# Altium PCB PCB1.PcbDoc
Units mil, origin at the board's own origin, x right, y up, seen from the top; angles counter-clockwise.
Board outline 3445 x 3905 mil, 4 copper layers (Top Layer, GND, VCC, Bottom Layer), stack 30.634 mil thick; 58 components, 59 nets, 334 pads, 77 vias.
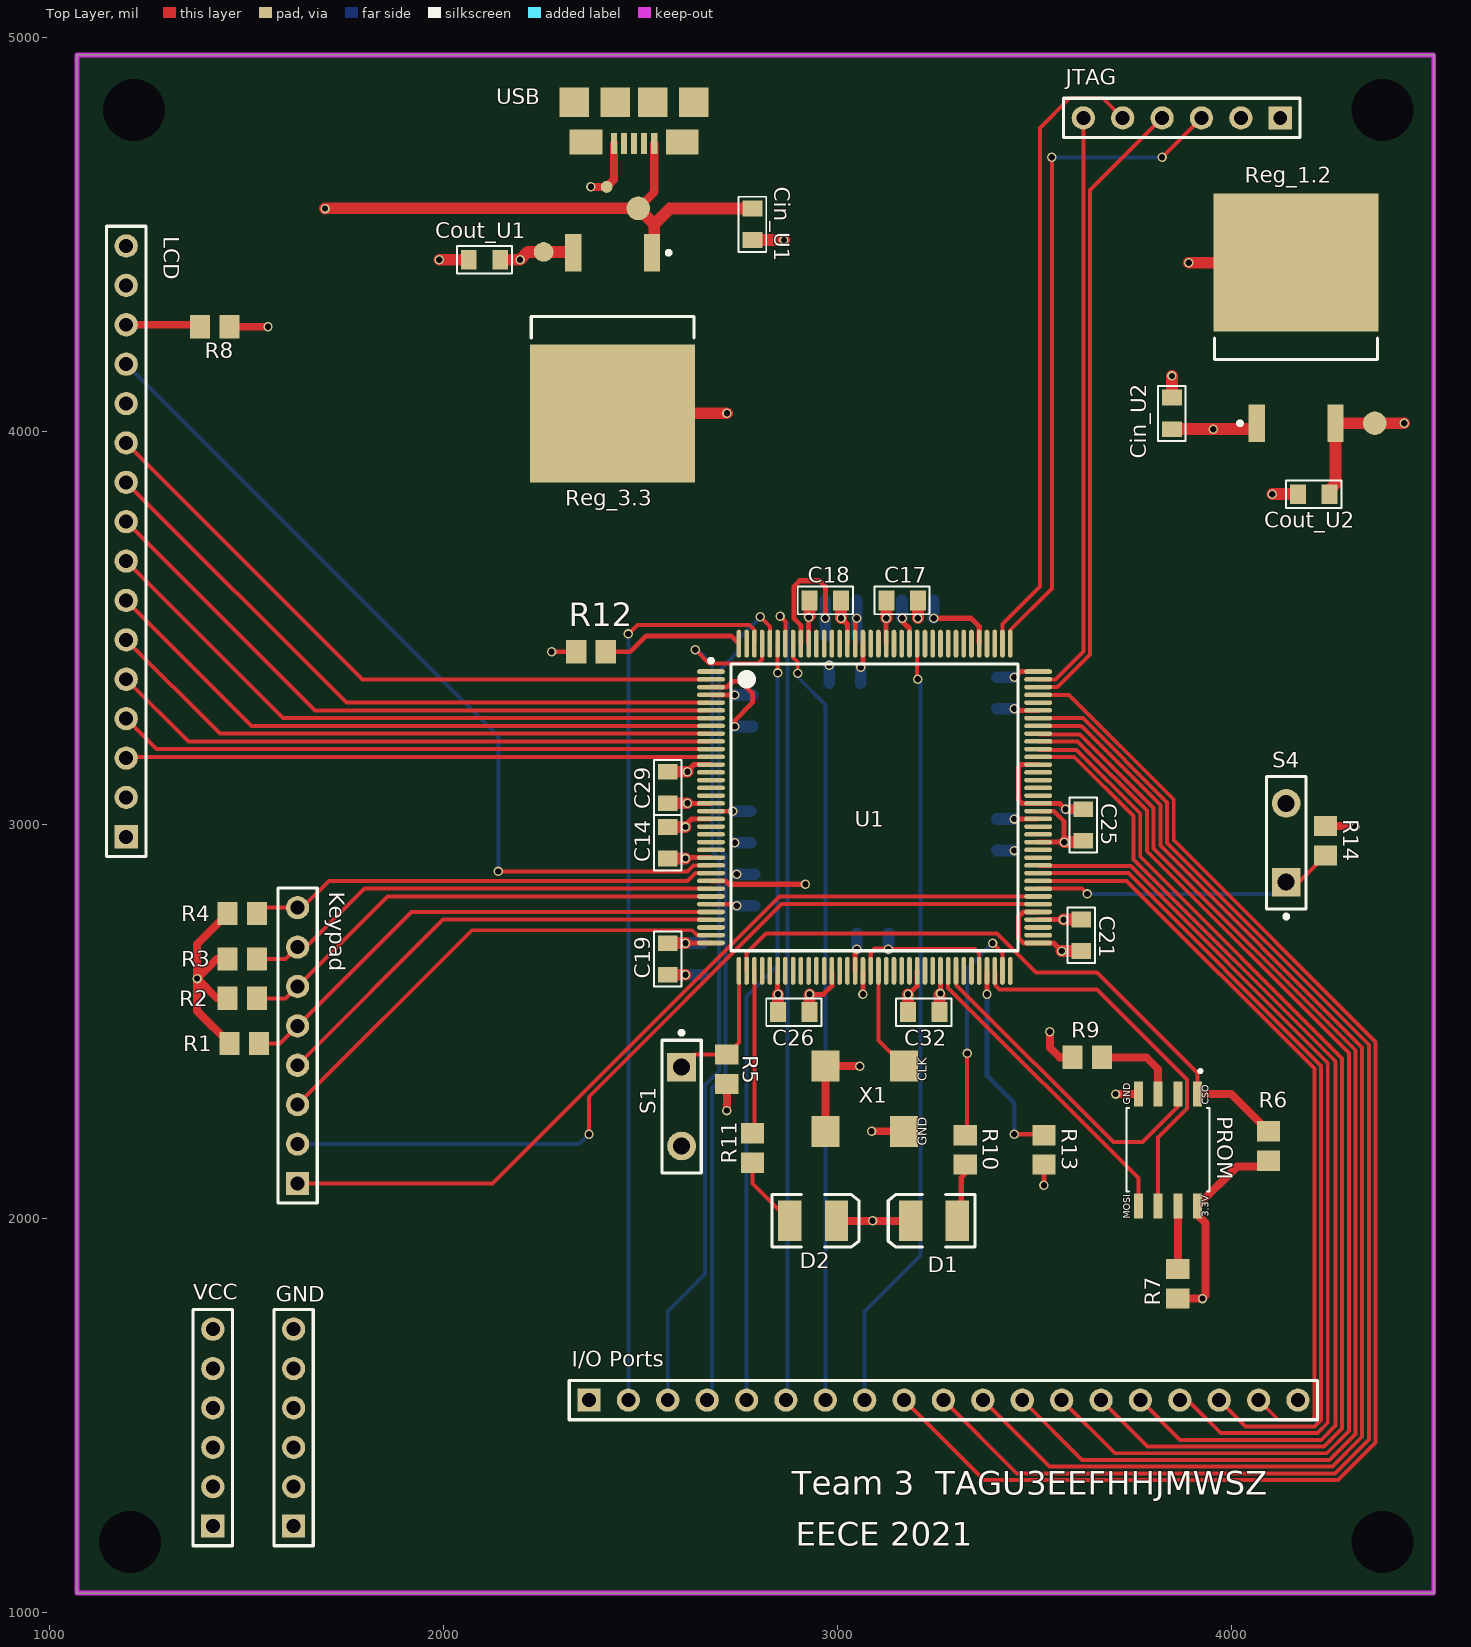
[diagram p0: Top Layer view]
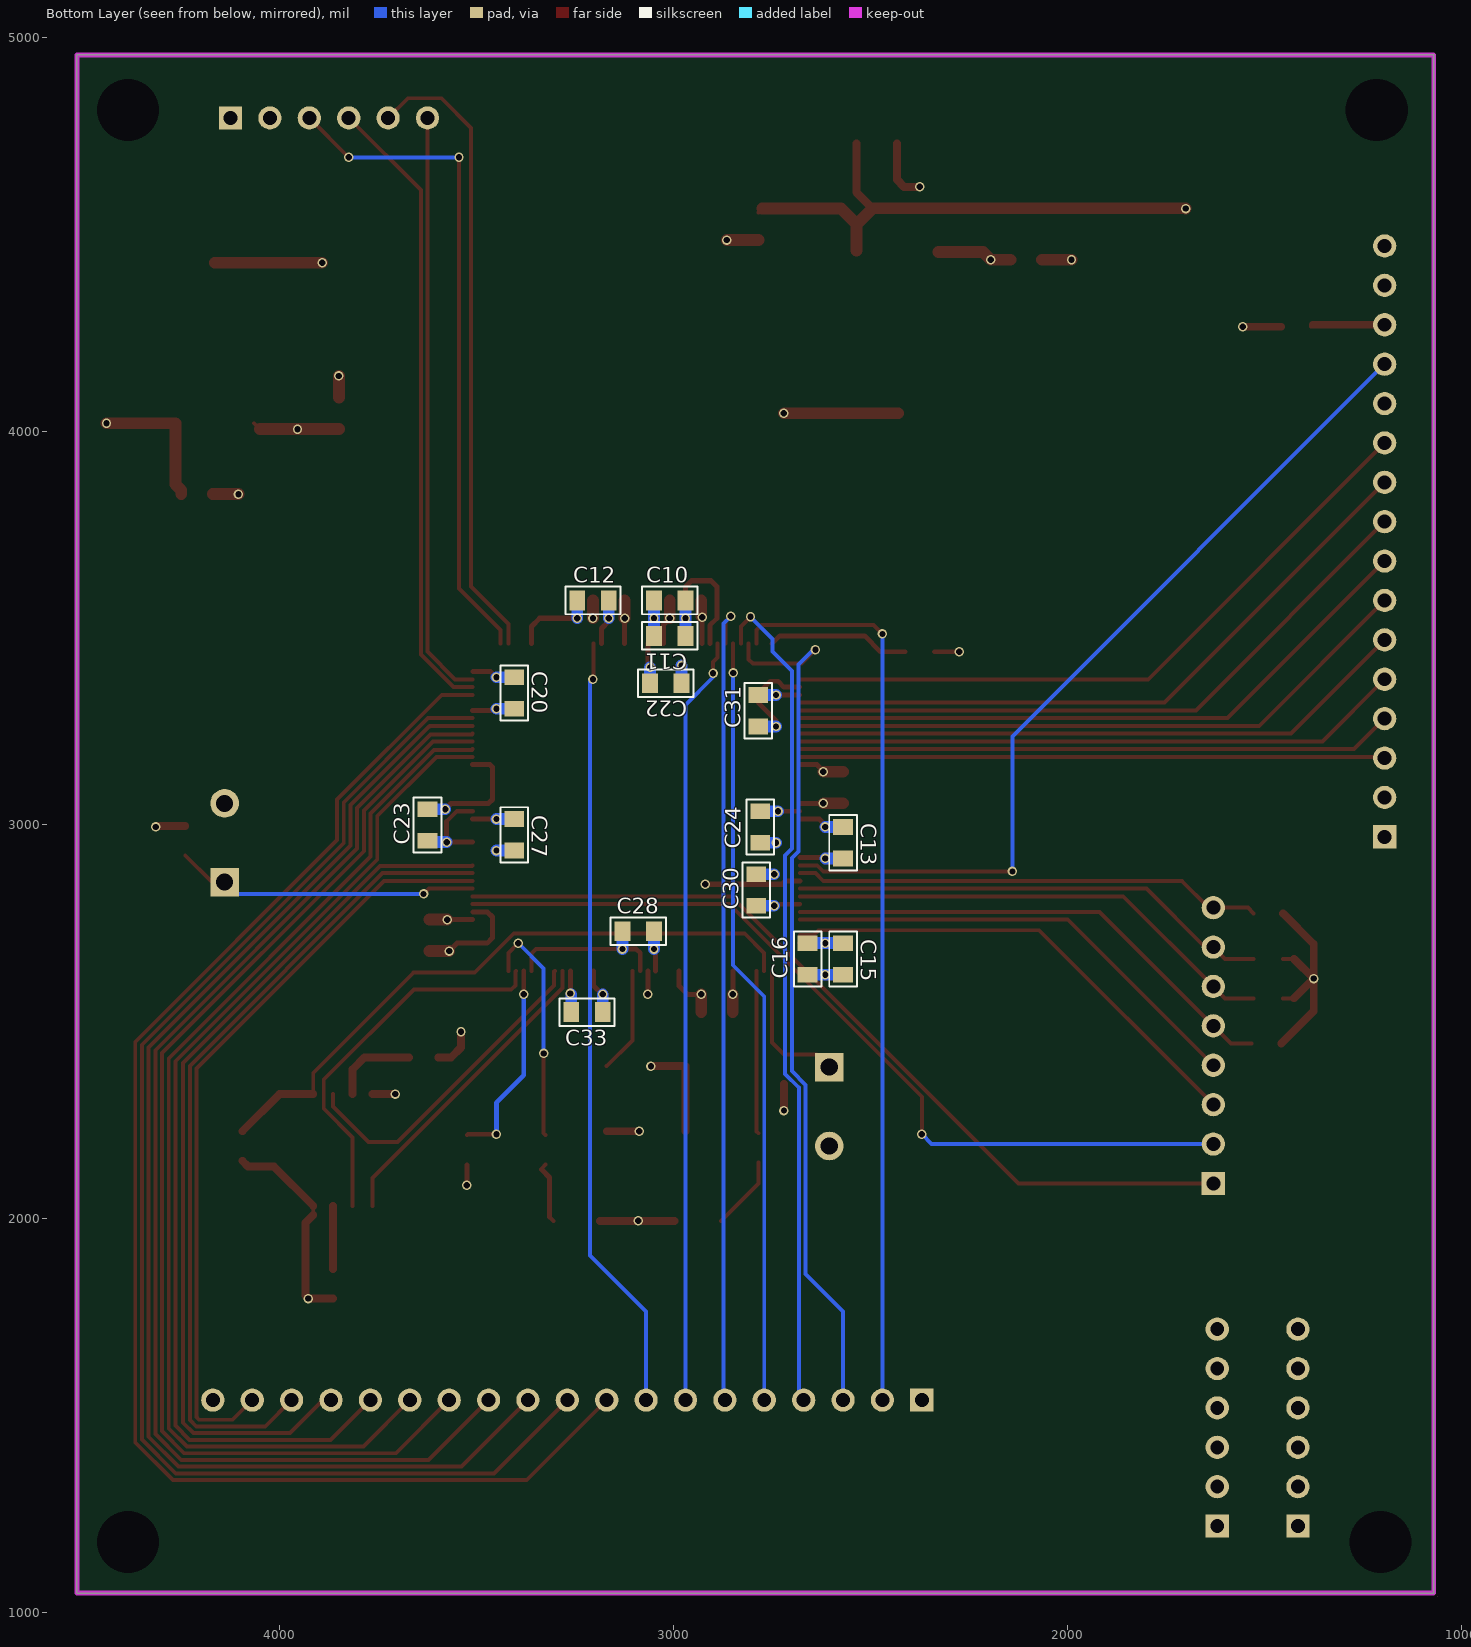
[diagram p1: Bottom Layer view, seen from below]
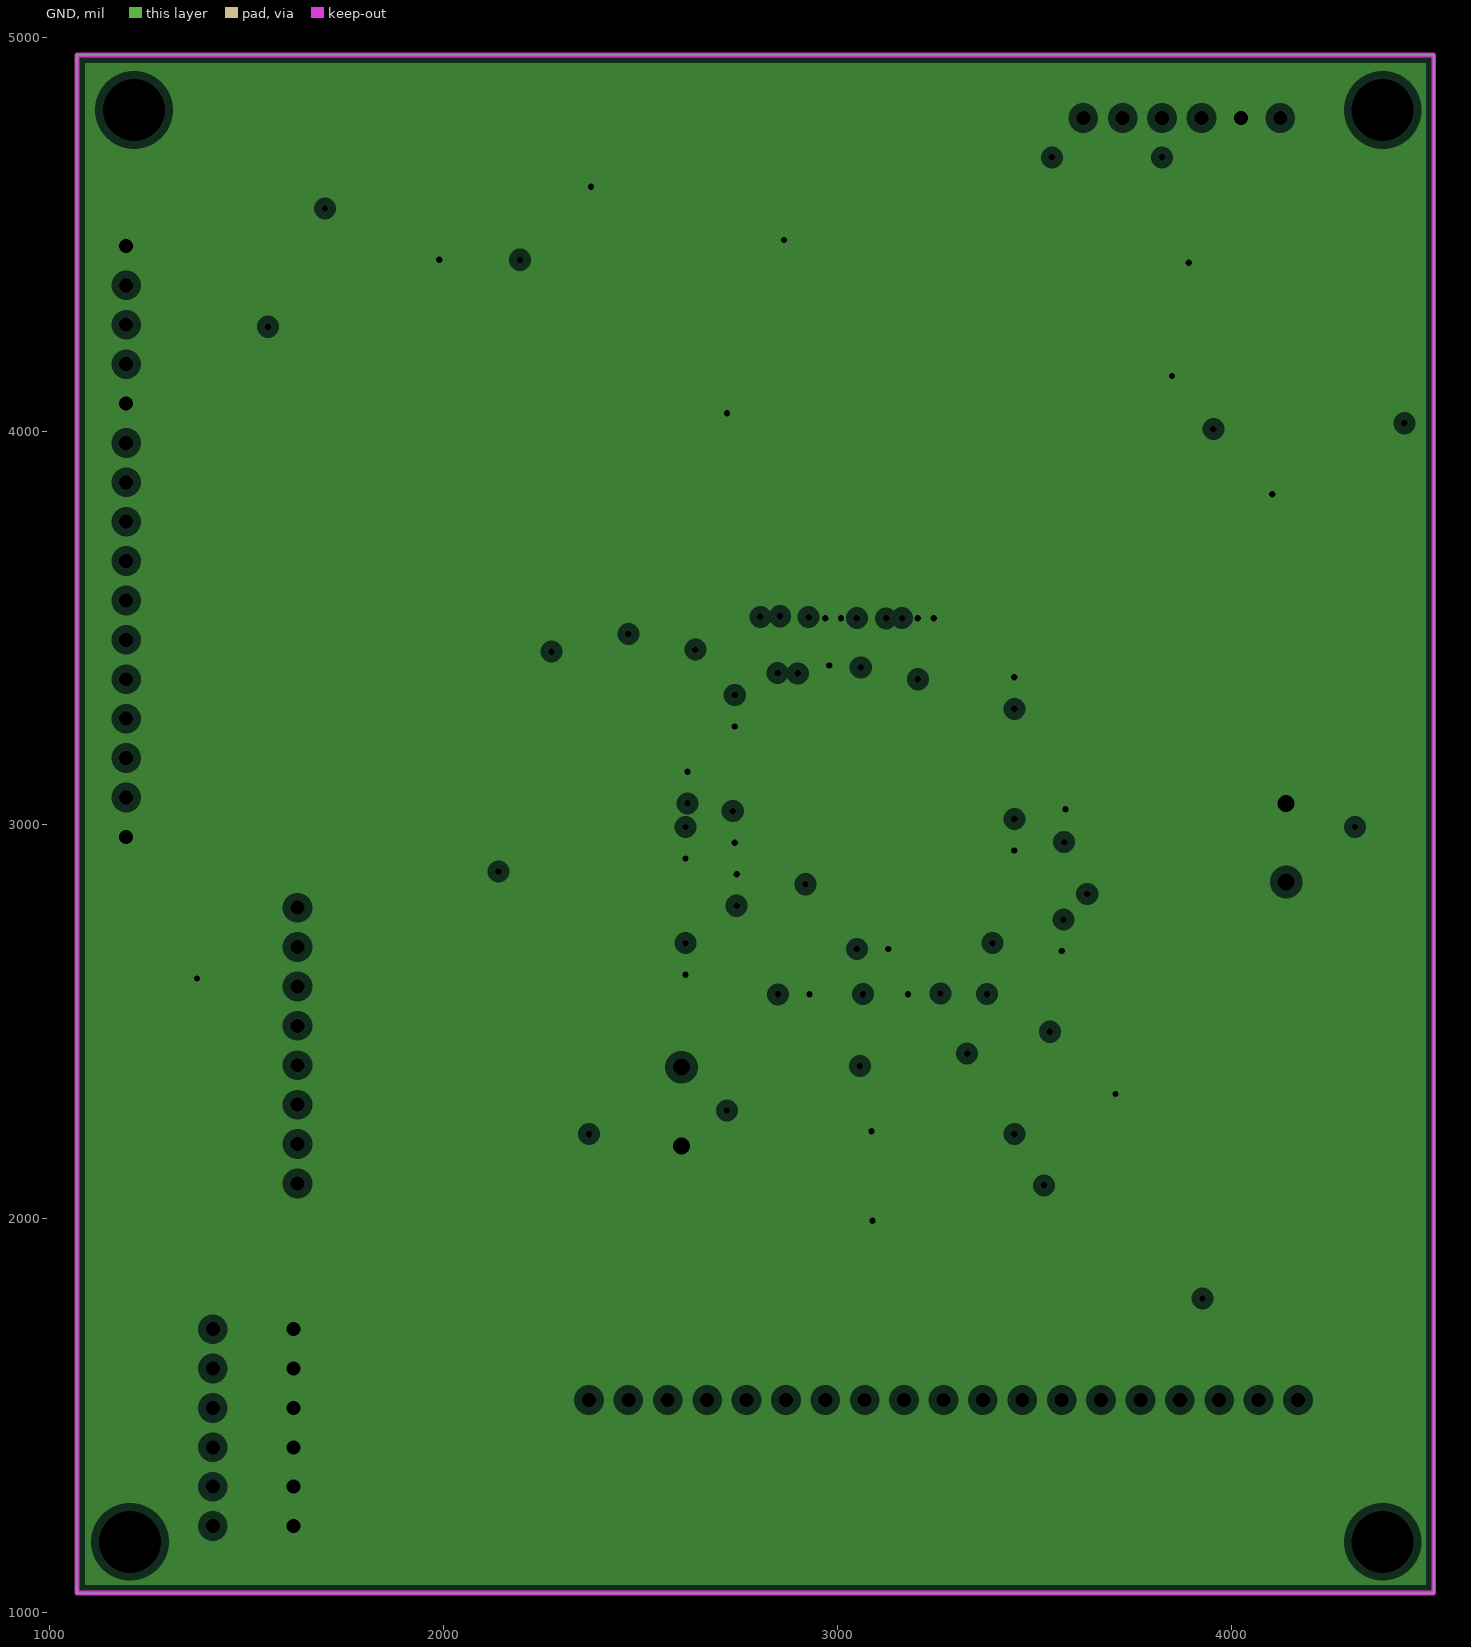
[diagram p2: GND, clearances drawn from the general rule]
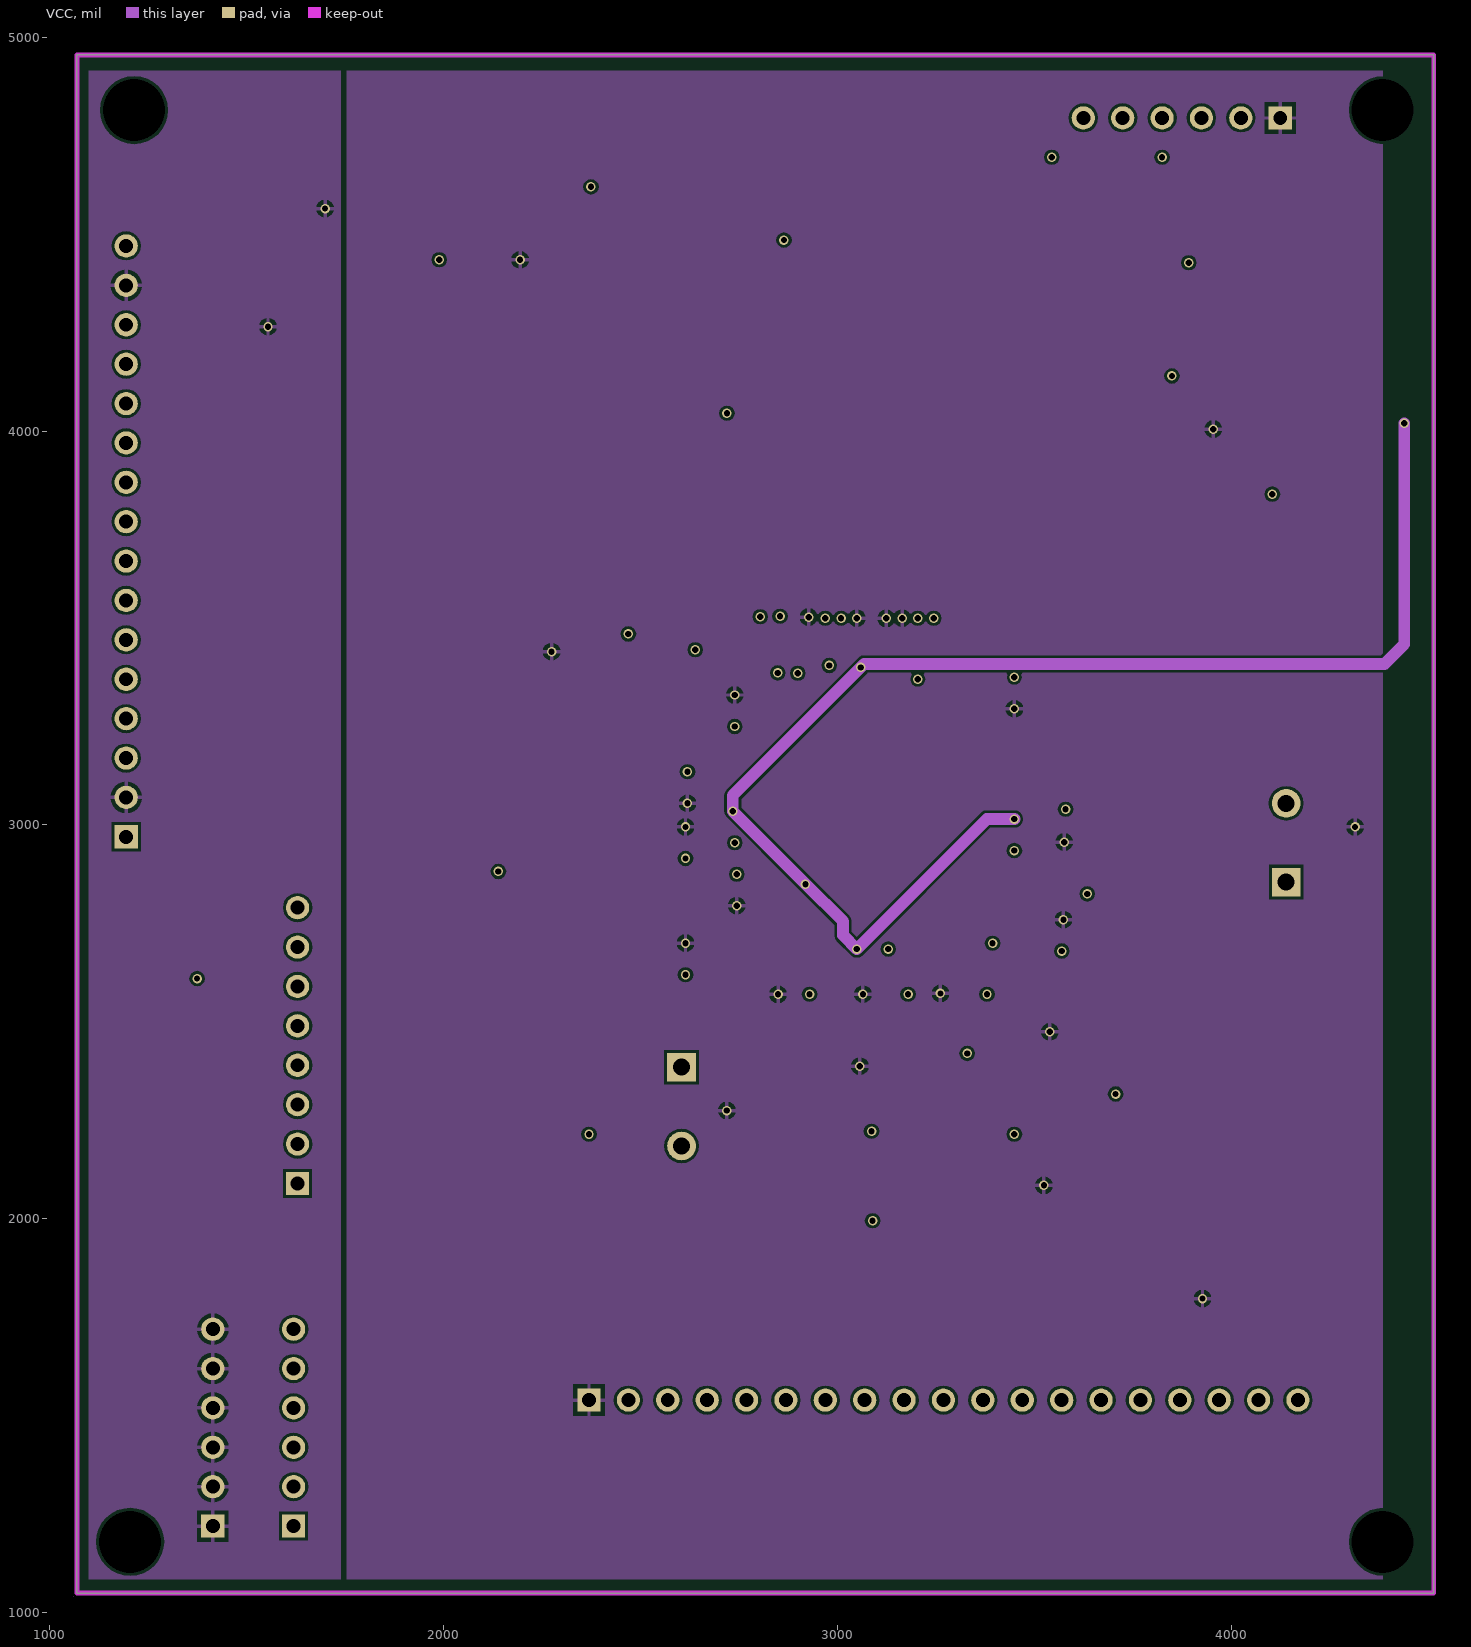
[diagram p3: VCC]

## Layer stack, top to bottom
Top Solder: solder mask 0.4, Solder Resist, Dk 3.5
Top Layer: signal copper 1.4
Dielectric 1: core 10, FR-4, Dk 4.2
GND: plane copper 1.417, net GND
Dielectric 3: prepreg 5, Dk 4.2
VCC: signal copper 1.417
Dielectric 2: core 10, Dk 4.2
Bottom Layer: signal copper 1.4
Bottom Solder: solder mask 0.4, Solder Resist, Dk 3.5

## Board outline
1070,1050 1070,4955 4515,4955 4515,1050
cut-out: 1060,1040

## Design rules (kind name [scope] priority, off if disabled: settings)
Clearance [All] p1: gap=7 ignorepadtopadclearanceinfootprint=FALSE
HoleSize [All] p1: absolutevalues=TRUE maxlimit=200 minlimit=1 maxpercent=80.000 minpercent=20.000
MinimumSolderMaskSliver [All] p1: minsoldermaskwidth=0
PlaneClearance [All] p1: clearance=20
PlaneConnect [All] p1: planeconnectstyle=Relief reliefexpansion=20 reliefentries=4 reliefconductorwidth=10 reliefairgap=10
PolygonConnect [All] p1: connectstyle=Relief reliefconductorwidth=10 reliefentries=4 polygonreliefangle="90 Angle" airgapwidth=10
RoutingVias [All] p1: holewidth=16 width=24 viastyle="Through Hole" minholewidth=16 minwidth=24 maxholewidth=28 maxwidth=50
SilkToSilkClearance [All] p1: silktosilkclearance=0
SilkToSolderMaskClearance [IsPad] p1: minsilkscreentomaskgap=0 clearancetoexposedcopper=TRUE
SolderMaskExpansion [All] p1: expansion=4
Width [All] p1: maxlimit=30 minlimit=10 preferedwidth=10
24 further rules are at their usual default settings.

## Classes and differential pairs
component class Sheet4: X1
component class Sheet5: C10 C11 C12 C13 C14 C15 C16 C17 C18 C19 C20 C21 C22 C23 C24 C25 C26 C27 C28 C29 C30 C31 C32 C33
component class Sheet1: U1
component class project1: Cin_U1 Cin_U2 Cout_U1 Cout_U2 Reg_1.2 Reg_3.3 USB
component class FPGA_SPI_JTAG_IO: D1 D2 GND "I/O Ports" JTAG Keypad LCD PROM R1 R2 R3 R4 R5 R6 R7 R8 R9 R10 R11 R12 R13 R14 S1 S4 VCC

## Components (designator, comment, footprint, x,y, rotation, side; value= is the part's Value field where it differs from the comment)
C10 "4.7uF" 0805C-GENERIC 3040,3570 r180 bottom
C11 "4.7uF" 0805C-GENERIC 3040,3480 r180 bottom
C12 "4.7uF" 0805C-GENERIC 3175,3570 r0 bottom
C13 "4.7uF" 0805C-GENERIC 2570,2985 r270 bottom
C14 "4.7uF" 0805C-GENERIC 2570,2985 r270 top
C15 "4.7uF" 0805C-GENERIC 2570,2690 r270 bottom
C16 "4.7uF" 0805C-GENERIC 2660,2690 r270 bottom
C17 "0.47uF" 0805C-GENERIC 3135,3570 r0 top
C18 "0.47uF" 0805C-GENERIC 2940,3570 r0 top
C19 "4.7uF" 0805C-GENERIC 2570,2690 r270 top
C20 "0.47uF" 0805C-GENERIC 3405,3305 r90 bottom
C21 "0.47uF" 0805C-GENERIC 3620,2750 r270 top
C22 "4.7uF" 0805C-GENERIC 3050,3360 r180 bottom
C23 "0.47uF" 0805C-GENERIC 3625,2970 r90 bottom
C24 "4.7uF" 0805C-GENERIC 2780,3025 r270 bottom
C25 "4.7uF" 0805C-GENERIC 3625,2970 r90 top
C26 "4.7uF" 0805C-GENERIC 2860,2525 r0 top
C27 "4.7uF" 0805C-GENERIC 3405,3005 r270 bottom
C28 "0.47uF" 0805C-GENERIC 3060,2730 r0 bottom
C29 "0.47uF" 0805C-GENERIC 2570,3065 r90 top
C30 "0.47uF" 0805C-GENERIC 2790,2805 r90 bottom
C31 "4.7uF" 0805C-GENERIC 2785,3320 r270 bottom
C32 "0.47uF" 0805C-GENERIC 3250,2525 r180 top
C33 "0.47uF" 0805C-GENERIC 3250,2525 r180 bottom
Cin_U1 "10uF" 0805C-GENERIC 2785,4555 r270 top
Cin_U2 "10uF" 0805C-GENERIC 3850,4015 r90 top
Cout_U1 "10uF" 0805C-GENERIC 2135,4435 r180 top
Cout_U2 "10uF" 0805C-GENERIC 4240,3840 r180 top
D1 "LED3" 3.5X2.8X1.9 3245.94,1995 r180 top
D2 "LED3" 3.5X2.8X1.9 2939.06,1995 r0 top
GND "Header GND" HDR1X6 1620,1220 r90 top (schematic designator P3)
"I/O Ports" "Header 19" HDR1X19 2370,1540 r0 top (schematic designator P6)
JTAG "Header jtag" HDR1X6 4125,4795 r180 top (schematic designator P1)
Keypad "Header keypad" HDR1X8 1630,2090 r90 top (schematic designator P5)
LCD "Header 16" HDR1X16 1195,2970 r90 top (schematic designator LCD_H)
PROM "W25Q16BVSSIG" *SOIC127P790X216-8N 3840,2175 r270 top (schematic designator SPI_MEM)
R1 "ERA6Y" ERA-0805 1495,2445 r0 top
R2 "ERA6Y" ERA-0805 1490,2560 r0 top
R3 "ERA6Y" ERA-0805 1490,2660 r0 top
R4 "ERA6Y" ERA-0805 1490,2775 r0 top
R5 "ERA6Y" ERA-0805 2720,2380 r90 top
R6 "ERA6Y" ERA-0805 4095,2185 r90 top
R7 "ERA6Y" ERA-0805 3865,1835 r90 top
R8 "ERA6Y" ERA-0805 1420,4265 r180 top
R9 "ERA6Y" ERA-0805 3635,2410 r0 top
R10 "ERA6Y" ERA-0805 3325,2175 r270 top
R11 "ERA6Y" ERA-0805 2785,2180 r270 top
R12 "ERA6Y" ERA-0805 2375,3440 r0 top
R13 "ERA6Y" ERA-0805 3525,2175 r90 top
R14 "ERA6Y" ERA-0805 4240,2960 r270 top
Reg_1.2 "Reg_1.2" D2PAK_N 4165,4287.72 r90 top
Reg_3.3 "Reg_3.3" D2PAK_N 2430,4185 r270 top
S1 "SW-PB" SPST-2 2605,2285 r270 top
S4 "SW-PB" SPST-2 4140,2955 r90 top
U1 "XC6SLX9-2TQG144C" TQG144_N 3095,3045 r0 top
USB "10118192-0001LF" 10118192-0001LF_10118192-0001LF(Primary) 2484.41,4891.42 r180 top (schematic designator J1)
VCC "Header VCC" HDR1X6 1415,1220 r90 top (schematic designator P2)
X1 "CB3LV-3I-25M0000" *OSCCC700X500X180-4N 3070,2305 r0 top

## Footprints (in the part's own frame and the unit in brackets; to place one, negate y for a bottom-side part, rotate by r counter-clockwise, add the part's x,y. Pads: shape width x height; smd on the part's side, far side on the other; paste and mask are expansions set on the pad)
3.5X2.8X1.9 [mm] "SM LED; 2 C-Bend Leads; Body 3.5 x 2.8 x 1.9 mm, inc leads (LxWxH typ)"
  rect 1.5x2.6 smd: 1(-1.5,0) 2(1.5,0)
  silkscreen extent -2.65,-1.7 2.95,1.7
0805C-GENERIC [mil] "CAPACITOR 0805"
  rect 40x50 smd: 1(-10,0) 2(70,0)
  silkscreen extent -40,-35 100,35, body extent -11,-25 70,25, height 26
10118192-0001LF_10118192-0001LF(Primary) [mm]
  rect 0.4x1.35 smd: 1(-1.3,4.1) 2(-0.65,4.1) 3(0,4.1) 4(0.65,4.1) 5(1.3,4.1)
  rect 1.9x1.9 smd: M1(-1.2,1.45) M2(1.2,1.45) S1(-3.85,1.45) S2(3.85,1.45)
  rect 2.1x1.6 smd: S3(-3.1,4) S4(3.1,4)
*OSCCC700X500X180-4N [mm]
  rect 1.8x2 smd: 1(-2.54,-2.1) 2(2.54,-2.1) 3(2.54,2.1) 4(-2.54,2.1)
*SOIC127P790X216-8N [mm]
  rect 1.61x0.58 smd: 1(-3.605,1.905) 2(-3.605,0.635) 3(-3.605,-0.635) 4(-3.605,-1.905) 5(3.605,-1.905) 6(3.605,-0.635) 7(3.605,0.635) 8(3.605,1.905)
  silkscreen extent -5.18,-2.69 2.69,2.69
D2PAK_N [mm] "D2-PAK, 4-Leads, Body 8.8x10.4mm, Pitch 2.54mm, Lead Span 15.1mm, IPC Medium Density"
  rect 2.4x1.05 smd: 1(-6.8,2.54) 3(-6.8,-2.54)
  rect 8.9x10.65 smd: 2(3.55,0)
  silkscreen extent -6.92,-5.25 -1.3,5.25, body extent -2.7,-5.28 6.3,5.28, height 4.69
ERA-0805 [mm] "Chip Resistor; Body 2 x 1.3 mm (LxW typ)"
  rect 1.3x1.5 smd: 1(-0.95,0) 2(0.95,0)
HDR1X6 [mm] "Connector; Header; 6 Position"
  rect 1.5x1.5 hole 0.9: 1(0,0)
  round 1.5 hole 0.9: 2(2.54,0) 3(5.08,0) 4(7.62,0) 5(10.16,0) 6(12.7,0)
  silkscreen extent -1.27,-1.27 13.97,1.27
HDR1X8 [mm] "Connector; Header; 8 Position"
  rect 1.5x1.5 hole 0.9: 1(0,0)
  round 1.5 hole 0.9: 2(2.54,0) 3(5.08,0) 4(7.62,0) 5(10.16,0) 6(12.7,0) 7(15.24,0) 8(17.78,0)
  silkscreen extent -1.27,-1.27 19.05,1.27
HDR1X16 [mm] "Connector; Header; 16 Position"
  rect 1.5x1.5 hole 0.9: 1(0,0)
  round 1.5 hole 0.9: 2(2.54,0) 3(5.08,0) 4(7.62,0) 5(10.16,0) 6(12.7,0) 7(15.24,0) 8(17.78,0) 9(20.32,0) 10(22.86,0) 11(25.4,0) 12(27.94,0) 13(30.48,0) 14(33.02,0) 15(35.56,0) 16(38.1,0)
  silkscreen extent -1.27,-1.27 39.37,1.27
HDR1X19 [mm] "Connector; Header; 19 Position"
  rect 1.5x1.5 hole 0.9: 1(0,0)
  round 1.5 hole 0.9: 2(2.54,0) 3(5.08,0) 4(7.62,0) 5(10.16,0) 6(12.7,0) 7(15.24,0) 8(17.78,0) 9(20.32,0) 10(22.86,0) 11(25.4,0) 12(27.94,0) 13(30.48,0) 14(33.02,0) 15(35.56,0) 16(38.1,0) 17(40.64,0) 18(43.18,0) 19(45.72,0)
  silkscreen extent -1.27,-1.27 46.99,1.27
SPST-2 [mm] "Switch; 2 Leads"
  rect 1.85x1.85 hole 1.1: 1(-2.54,0)
  round 1.85 hole 1.1: 2(2.54,0)
  silkscreen extent -4.89,-1.27 4.28,1.27
TQG144_N [mm] "Thin QFP, 144-Leads, Body 20x20mm, Pitch 0.5mm, IPC Medium Density"
  oval 1.8x0.3 smd: 1(-10.55,8.75) 2(-10.55,8.25) 3(-10.55,7.75) 4(-10.55,7.25) 5(-10.55,6.75) 6(-10.55,6.25) 7(-10.55,5.75) 8(-10.55,5.25) 9(-10.55,4.75) 10(-10.55,4.25) 11(-10.55,3.75) 12(-10.55,3.25) 13(-10.55,2.75) 14(-10.55,2.25) 15(-10.55,1.75) 16(-10.55,1.25) 17(-10.55,0.75) 18(-10.55,0.25) 19(-10.55,-0.25) 20(-10.55,-0.75) 21(-10.55,-1.25) 22(-10.55,-1.75) 23(-10.55,-2.25) 24(-10.55,-2.75) 25(-10.55,-3.25) 26(-10.55,-3.75) 27(-10.55,-4.25) 28(-10.55,-4.75) 29(-10.55,-5.25) 30(-10.55,-5.75) 31(-10.55,-6.25) 32(-10.55,-6.75) 33(-10.55,-7.25) 34(-10.55,-7.75) 35(-10.55,-8.25) 36(-10.55,-8.75) 73(10.55,-8.75) 74(10.55,-8.25) 75(10.55,-7.75) 76(10.55,-7.25) 77(10.55,-6.75) 78(10.55,-6.25) 79(10.55,-5.75) 80(10.55,-5.25) 81(10.55,-4.75) 82(10.55,-4.25) 83(10.55,-3.75) 84(10.55,-3.25) 85(10.55,-2.75) 86(10.55,-2.25) 87(10.55,-1.75) 88(10.55,-1.25) 89(10.55,-0.75) 90(10.55,-0.25) 91(10.55,0.25) 92(10.55,0.75) 93(10.55,1.25) 94(10.55,1.75) 95(10.55,2.25) 96(10.55,2.75) 97(10.55,3.25) 98(10.55,3.75) 99(10.55,4.25) 100(10.55,4.75) 101(10.55,5.25) 102(10.55,5.75) 103(10.55,6.25) 104(10.55,6.75) 105(10.55,7.25) 106(10.55,7.75) 107(10.55,8.25) 108(10.55,8.75)
  oval 0.3x1.8 smd: 37(-8.75,-10.55) 38(-8.25,-10.55) 39(-7.75,-10.55) 40(-7.25,-10.55) 41(-6.75,-10.55) 42(-6.25,-10.55) 43(-5.75,-10.55) 44(-5.25,-10.55) 45(-4.75,-10.55) 46(-4.25,-10.55) 47(-3.75,-10.55) 48(-3.25,-10.55) 49(-2.75,-10.55) 50(-2.25,-10.55) 51(-1.75,-10.55) 52(-1.25,-10.55) 53(-0.75,-10.55) 54(-0.25,-10.55) 55(0.25,-10.55) 56(0.75,-10.55) 57(1.25,-10.55) 58(1.75,-10.55) 59(2.25,-10.55) 60(2.75,-10.55) 61(3.25,-10.55) 62(3.75,-10.55) 63(4.25,-10.55) 64(4.75,-10.55) 65(5.25,-10.55) 66(5.75,-10.55) 67(6.25,-10.55) 68(6.75,-10.55) 69(7.25,-10.55) 70(7.75,-10.55) 71(8.25,-10.55) 72(8.75,-10.55) 109(8.75,10.55) 110(8.25,10.55) 111(7.75,10.55) 112(7.25,10.55) 113(6.75,10.55) 114(6.25,10.55) 115(5.75,10.55) 116(5.25,10.55) 117(4.75,10.55) 118(4.25,10.55) 119(3.75,10.55) 120(3.25,10.55) 121(2.75,10.55) 122(2.25,10.55) 123(1.75,10.55) 124(1.25,10.55) 125(0.75,10.55) 126(0.25,10.55) 127(-0.25,10.55) 128(-0.75,10.55) 129(-1.25,10.55) 130(-1.75,10.55) 131(-2.25,10.55) 132(-2.75,10.55) 133(-3.25,10.55) 134(-3.75,10.55) 135(-4.25,10.55) 136(-4.75,10.55) 137(-5.25,10.55) 138(-5.75,10.55) 139(-6.25,10.55) 140(-6.75,10.55) 141(-7.25,10.55) 142(-7.75,10.55) 143(-8.25,10.55) 144(-8.75,10.55)
  silkscreen extent -10.67,-9.25 9.25,9.57, body extent -10,-10 10,10, height 1.6

## Part data
C10 C11 C12 C13 C14 C15 C16 C17 C18 C19 C20 C21 C22 C23 C24 C25 C26 C27 C28 C29 C30 C31 C32 C33: library part 0805C-4U7-25V-X5R-TDK, "CAPACITOR 0805 CERAMIC", Capacitance=4.7µF, Manufacturer="TDK Corporation", Manufacturer Part Number=C2012X5R1E475K, Operating Temperature="-55°C ~ 85°C", Package / Case="0805 (2012 Metric)", Supplier Part Number=445-4116-1-ND, Temperature Coefficient=X5R, Tolerance=±10%, Voltage - Rated=25V, Category=Capacitors, Features="General Purpose", Lead Spacing=-, Mounting Type="Surface Mount, MLCC", Packaging="Cut Tape (CT)", REEL=C102, RoHS="RoHS Compliant", Supplier=Digi-Key, Supplier 1=Digi-Key, Supplier Part Number 1=445-4116-1-ND, Thickness=1.25mm
Cin_U1 Cin_U2 Cout_U1 Cout_U2: library part 0805C-10UF-16V-X5R-TDK, "CAPACITOR 0805 CERAMIC", Manufacturer="TDK Corporation", Manufacturer Part Number=C2012X5R1C106M, Supplier Part Number 1=445-4115-2-ND, REEL=C63, Supplier 1=Digi-Key
D1 D2: "Typical BLUE SiC LED", DatasheetVersion=16-Apr-2002, LatestRevisionDate=17-Dec-2003, LatestRevisionNote="PCB Footprint replaced.", PackageDescription="SM LED; 2 C-Bend Leads; Body 3.5 x 2.8 x 1.9 mm, inc leads (LxWxH typ)", PackageReference=3.5X2.8X1.9, PackageVersion=16-Apr-2002, Published=8-Jun-2000, Publisher="Altium Limited"
GND JTAG VCC: library part "Header 6", "Header, 6-Pin", LatestRevisionDate=17-Jul-2002, LatestRevisionNote="Re-released for DXP Platform.", Publisher="Altium Limited"
"I/O Ports": "Header, 19-Pin", LatestRevisionDate=17-Jul-2002, LatestRevisionNote="Re-released for DXP Platform.", Publisher="Altium Limited"
Keypad: library part "Header 8", "Header, 8-Pin", LatestRevisionDate=17-Jul-2002, LatestRevisionNote="Re-released for DXP Platform.", Publisher="Altium Limited"
LCD: "Header, 16-Pin", LatestRevisionDate=17-Jul-2002, LatestRevisionNote="Re-released for DXP Platform.", Publisher="Altium Limited"
PROM: "Flash, pin, soic, flash, Memory, Semiconductors and Actives, serial, ic", Package="SOIC-8 Winbond", Digi-Key_Part_Number=W25Q16BVSSIG-ND, Digi-Key_Purchase_URL=https://www.digikey.com/product-detail/en/winbond-electronics/W25Q16BVSSIG/W25Q16BVSSIG-ND/2208449?utm_source=snapeda&utm_medium=aggregator&utm_campaign=symbol, MF=Winbond, MP=W25Q16BVSSIG, SnapEDA_Link=https://www.snapeda.com/parts/W25Q16BVSSIG/Winbond%20Electronics/view-part/?ref=snap
R1 R2 R3 R4 R5 R6 R7 R8 R9 R10 R11 R12 R13 R14: "Rectangular Thick Film Chip Resistor, 10 Ohm to 1M Ohm Range, 0.1% and 0.5% Tolerance, 0805 Size, 0.1 W", PackageDocument=Mar-2003, Code_IPC="2012 [0805]", ComponentLink1Description="Manufacturer Link", ComponentLink1URL=http://www.panasonic.com/industrial/components/resistive_products.htm, ComponentLink2Description=Datasheet, ComponentLink2URL=http://www.panasonic.com/industrial/components/pdf/AOA0000CE8.pdf, LatestRevisionDate=19-Mar-2004, LatestRevisionNote="Silkscreen size reduced.", Note="If flow soldering, adjust pad width of PCB Footprint to 0.7 - 0.8 times the width of the resistor.", PackageReference=ERA-0805, Published=17-Dec-2003, Publisher="Altium Limited"
Reg_1.2 Reg_3.3: library part "Volt Reg", "Voltage Regulator", LatestRevisionDate=29-May-2009, LatestRevisionNote="IPC-7351 Footprint Added.", PackageDescription="3-Pin Transistor Outline Package 2.54 mm Pitch, 15.1 mm Lead Span", PackageReference=D2PAK, Published=24-Mar-1999, Publisher="Altium Limited"
S1 S4: "Switch", LatestRevisionDate=17-Jul-2002, LatestRevisionNote="Re-released for DXP Platform.", PackageDescription="Switch; 2 Leads", PackageReference=SPST-2, Published=24-Mar-1999, Publisher="Altium Limited"
U1: "Spartan-6 LX 1.2V FPGA, 102 User I/Os, 144-Pin TQFP (0.5mm Pitch), Speed Grade 2, Commercial Grade, Pb-Free", Code_JEDEC=MS-026-BFB, ComponentLink1Description="Manufacturer URL", ComponentLink1URL=http://www.xilinx.com/, ComponentLink2Description="Spartan-6 Datasheet", ComponentLink2URL=http://www.xilinx.com/support/documentation/data_sheets/ds160.pdf, ComponentLink3Description="Spartan-6 Documents", ComponentLink3URL=http://www.xilinx.com/support/documentation/spartan-6.htm, DatasheetVersion="ver1.6, Nov-2010", PackageDescription="144-Pin Thin Quad Flat Pack (TQG144) - Pb-Free", PackageReference=TQG144, PackageVersion="ver1.2, Jun-2004"
USB: "Conn Micro USB Type B RCP 5 POS 0.65mm Solder RA SMD 5 Terminal 1 Port T/R", Package=None, Availability=Good, MF=Amphenol, MP=10118192-0001LF, Price="0.23 USD", SnapEDA_Link=https://www.snapeda.com/parts/10118192-0001LF/Amphenol%20Solar/view-part/?ref=snap
X1: "CB3LV Series 25 MHz 7 x 5 mm 3.3 V ±50 ppm SMT HCMOS/TTL Clock Oscillator", Package="SMD-4 CTS Components", Availability=Unavailable, MF=CTS-Frequency, MP=CB3LV-3I-25M0000, Price=None, SnapEDA_Link=https://www.snapeda.com/parts/CB3LV-3I-25M0000/CTS-Frequency%20Controls/view-part/?ref=snap

## Free pads (board coordinates)
  round 60 hole 157.48: 2(4385,1180) 4(1205,1180) 5(4385,4815) 6(1215,4815)
  round 50 smd: 8(2255,4455)
  round 60 smd: 9(4365,4020) 11(2495,4565.59)
  round 30 smd: 10(2415,4620)

## Via types
v1: diameter 24, hole 16, Top Layer to Bottom Layer, tented top, 45 vias
v2: diameter 24, hole 16, Top Layer to Bottom Layer, 32 vias

## Nets (pads, with @x,y where several pads share a name; then routed paths per layer and width w, separated by ;. In a path a pad name is that pad's centre, name@x,y a point inside that pad or via, vN(x,y) a via of type N, cw(c..) or ccw(c..) an arc to the next point about the centre after c; other vN are vias at no path point)
"3.3 Volts": "I/O Ports.1" C10.1 C11.1 C12.1 C13.1 C14.1 C15.1 C16.1 C17.1 C18.1 C19.1 C20.1 C21.1 C23.1 C25.1 C26.1 C29.1 C30.1 C31.1 C32.1 C33.1 Cin_U2.1 Cout_U1.1 JTAG.1 pad.8 PROM.8 R5.1 R6.1 R7.1 R9.1 R12.1 R13.1 R14.1 Reg_1.2.1 Reg_3.3.3 U1.4 U1.18 U1.20 U1.31 U1.36 U1.42 U1.53 U1.63 U1.76 U1.86 U1.90 U1.103 U1.122 U1.125 U1.129 U1.135 X1.1 X1.4 | length 3591.6
  Top Layer w10: 2215,4455 2220,4455 ; Reg_3.3.3@2327.72,4455 Reg_3.3.3 ; v1(2615,2700) v1@2615.51,2700.51 ; v1(2615,2995) v1@2615,3000 ; v1(2620,3055) v1@2620.16,3054.84 ; U1.31@2678.58,2800 U1.31 ; U1.18@2679.49,3055 U1.18 ; U1.4 U1.4@2680.08,3330 ; v1@2741.06,2798.94 v1(2745,2795) ; v1@2848.94,2571.06 v1(2850,2570) ; v1(2927.68,3527.68) v1@2930,3530 ; v1(3124.53,3524.53) v1@3125,3525 ; v1@3260,2570 v1(3262.32,2572.32) ; v1(3574.57,2759.57) v1@3575,2760 ; C25.1@3616.42,2956.42 C25.1@3620,2960 ; PROM.8@3915,2010 PROM.8 ; Reg_1.2.1@4050,4005 Reg_1.2.1 ; v2@4312.6,2997.4 v2(4315,2995)
  Top Layer w11: 3549.84,3035.16 3576.42,3008.58
  Top Layer w12: v2(2275,3440) R12.1 ; U1.31 v1@2741.06,2798.94 ; U1.4@2680.08,3330 v1(2740,3330) ; U1.129 3045.79,3520.79 v1(3050,3525) ; v1(3065.47,2570.47) U1.53 ; U1.90 3549.84,3035.16 ; v2(3525,2085) R13.1
  Top Layer w13: v1@2615,3000 2630.47,3015.47 U1.20 ; v1@2615.51,2700.51 U1.36 ; v1@2620.16,3054.84 U1.18 ; v1@2848.94,2571.06 U1.42 ; U1.135 v1(2927.68,3527.68) ; U1.125 v1(3124.53,3524.53) ; v1(3165,3525) 3165,3517.17 3183.58,3498.58 U1.122 ; v1(3262.32,2572.32) U1.63 ; v1(3450,3295) 3453.94,3291.06 U1.103 ; U1.76 v1(3574.57,2759.57) ; U1.86 v1(3576.42,2956.42) 3576.42,3008.58
  Top Layer w20: v2(2720,2275) R5.1 ; X1.1 X1.4 v2(3057.68,2387.68) ; v2(3540,2475) 3540,2435 3565,2410 R9.1 ; R7.1 v2(3927.6,1797.6) 3935,1805 3935,1990 PROM.8@3915,2010 ; PROM.8 4015,2133.07 4080.47,2133.07 R6.1 ; R14.1 v2@4312.6,2997.4
  Top Layer w30: Cout_U1.1 v2(2195,4435) 2215,4455 ; 2220,4455 pad.8 Reg_3.3.3@2327.72,4455 ; C19.1 v1(2615,2700) ; C14.1 v1(2615,2995) ; C29.1 v1(2620,3055) ; C26.1 v1(2850,2570) ; v1@2930,3530 C18.1 ; v1@3125,3525 C17.1 ; C32.1 v1@3260,2570 ; v1@3575,2760 C21.1 ; v1(3576.42,2956.42) C25.1@3616.42,2956.42 ; Cin_U2.1 v2(3955,4005) Reg_1.2.1@4050,4005
  Bottom Layer w10: v1@3260,2570 v1(3262.32,2572.32) ; v1@3571.42,2956.42 v1@3575,2960 ; C23.1@3621.42,2956.42 C23.1
  Bottom Layer w30: C15.1 v1(2615,2700) C16.1 ; C13.1 v1(2615,2995) ; v1(2740,3330) C31.1 ; v1(2745,2795) C30.1 ; C11.1 v1(3050,3525) C10.1 ; v1(3165,3525) C12.1 ; C33.1 v1@3260,2570 ; C20.1 v1(3450,3295) ; v1(3576.42,2956.42) C23.1@3621.42,2956.42
CCLK: PROM.6 U1.70 | length 974.2
  Top Layer w10: U1.70 3401.9,2627.87 3401.9,2592.7 3412.39,2582.21 3659.8,2582.21 3888.42,2353.59 3888.42,2280.27 3815,2206.85 PROM.6
COL0: Keypad.1 U1.79 | length 2182.2
  Top Layer w10: Keypad.1 2125,2090 2853.62,2818.62 U1.79
COL1: Keypad.2 U1.78 | length 2188.2
  Top Layer w10: v2(2370,2215) 2370,2310 2858.94,2798.94 U1.78
  Bottom Layer w10: Keypad.2 2345,2190 v2(2370,2215)
COL2: Keypad.3 U1.35 | length 1238.5
  Top Layer w10: Keypad.3 2072.79,2732.79 2632.21,2732.79 2632.21,2732.47 2644.48,2720.2 U1.35
COL3: Keypad.4 U1.33 | length 1202.7
  Top Layer w10: Keypad.4 1999.57,2759.57 U1.33
CSO: PROM.1 R6.2 U1.38 | length 1629.1
  Top Layer w10: U1.38 2770.2,2674.6 2819.6,2724 3406,2724 3505,2625 3660,2625 3915,2370 PROM.1
  Top Layer w20: PROM.1 4000.47,2316.93 R6.2
D0: LCD.10 U1.5 | length 1716.3
  Top Layer w10: LCD.10 1754.25,3310.75 U1.5
D1: LCD.9 U1.6 | length 1683
  Top Layer w10: LCD.9 1673.94,3291.06 U1.6
D2: LCD.8 U1.7 | length 1649.8
  Top Layer w10: LCD.8 1593.62,3271.38 U1.7
D3: LCD.7 U1.8 | length 1616.5
  Top Layer w10: LCD.7 1513.31,3251.69 U1.8
D4: LCD.6 U1.9 | length 1583.2
  Top Layer w10: LCD.6 1432.99,3232.01 U1.9
D5: LCD.5 U1.10 | length 1550
  Top Layer w10: LCD.5 1352.68,3212.32 U1.10
D6: LCD.4 U1.11 | length 1516.7
  Top Layer w10: LCD.4 1272.36,3192.64 U1.11
D7: LCD.3 U1.12 | length 1485.9
  Top Layer w10: LCD.3 1197.95,3172.95 U1.12
DIN: PROM.2 U1.65 | length 833.2
  Top Layer w10: U1.65 3303.47,2627.87 3303.47,2592.7 3701.17,2195 3775,2195 3865,2285 PROM.2
DONE: R10.1 U1.71 | length 597.2
  Top Layer w10: R10.1 3330,2217.4 v2(3330,2420) ; v1(3394.61,2700) 3419.8,2674.8 U1.71
  Bottom Layer w10: v2(3330,2420) 3330,2635.39 v1(3394.61,2700)
ENABLE: LCD.11 U1.2 | length 1733.3
  Top Layer w10: LCD.11 1795.2,3369.8 U1.2
GND: C10.2 C11.2 C12.2 C13.2 C14.2 C15.2 C16.2 C17.2 C18.2 C19.2 C20.2 C21.2 C22.2 C23.2 C24.2 C25.2 C26.2 C27.2 C28.2 C29.2 C30.2 C31.2 C32.2 C33.2 Cin_U1.2 Cin_U2.2 Cout_U1.2 Cout_U2.2 D1.2 D2.2 GND.1 GND.2 GND.3 GND.4 GND.5 GND.6 JTAG.2 LCD.1 LCD.12 LCD.16 pad.10 PROM.4 R1.1 R2.1 R3.1 R4.1 Reg_1.2.2 Reg_3.3.2 S1.2 S4.2 U1.3 U1.13 U1.25 U1.49 U1.54 U1.60 U1.68 U1.73 U1.77 U1.91 U1.96 U1.108 U1.113 U1.130 U1.136 USB.5 X1.2 | length 5035.2
  Top Layer w10: 1425,2560 R2.1 ; 1425,2660 R3.1 ; v1(2615,2915) v1@2617.05,2917.05 ; v1(2620,3135) v1@2620,3136.54 ; v1(3130,2685) 3350,2685 3360.75,2674.25 U1.68 ; v1(3180,2570) v1@3181.54,2570 ; U1.73@3509.84,2700 U1.73 ; U1.91@3510.2,3055 U1.91
  Top Layer w12: U1.3 2720.12,3350.12 2735,3365 2755,3365 2785,3335 2785,3310 2740,3265 v1(2740,3250) ; 2890,3525 2907.99,3507.01 U1.136 ; U1.54 3085.16,2675.16 3095,2685 v1(3130,2685) ; v1(3450,3375) 3464.49,3389.49 U1.108 ; U1.77@3479.25,2779.25 U1.77
  Top Layer w13: v1@2617.05,2917.05 U1.25 ; v1@2620,3136.54 2636.73,3153.27 U1.13 ; 2890,3525 2890,3605 2905,3620 2955,3620 2970,3605 v1(2970,3525) ; v1(2930,2570) 2965,2570 2986.73,2591.73 U1.49 ; v1(3010,3525) 3026.1,3508.9 U1.130 ; v1@3181.54,2570 3203.27,2591.73 U1.60 ; v1(3245,3525) 3340,3525 3360.75,3504.25 U1.113 ; U1.77@3479.25,2779.25 3473.07,2779.25 3460,2766.18 3460,2713.58 3473.58,2700 U1.73@3509.84,2700 ; U1.91@3510.2,3055 3470,3055 3460,3065 3460,3146.54 3466.73,3153.27 U1.96 ; U1.73 3549.49,2700.51 v1(3570,2680) ; U1.91 3565.16,3054.84 v1(3580,3040)
  Top Layer w20: 1425,2560 v2(1375,2610) ; 1425,2660 v2(1375,2610) ; R4.1 1375,2697.4 v2(1375,2610) ; R1.1 1375,2527.6 v2(1375,2610) ; v2(2375,4620) pad.10 ; D2.2 v2(3090,1995) D1.2 ; v2(3087.32,2222.32) X1.2 ; v1(3706.93,2316.93) PROM.4
  Top Layer w21: pad.10 2433.23,4638.23 USB.5
  Top Layer w24: v1(3580,3040) C25.2
  Top Layer w30: v2(1990,4435) Cout_U1.2 ; Reg_3.3.2 v2(2720.24,4045.24) ; C19.2 v1(2615,2620) ; C14.2 v1(2615,2915) ; C29.2 v1(2620,3135) ; Cin_U1.2 v2(2865,4485) ; C26.2 v1(2930,2570) ; v1(3010,3525) C18.2 ; C32.2@3180,2530 v1(3180,2570) ; v1(3205,3525) C17.2 ; v1(3570,2680) C21.2 ; Cin_U2.2 v2(3850,4140) ; v2(3892.48,4427.48) Reg_1.2.2 ; v2(4105,3840) Cout_U2.2
  Bottom Layer w10: v1@3575,3040 v1(3580,3040)
  Bottom Layer w30: C15.2 v1(2615,2620) C16.2 ; C13.2 v1(2615,2915) ; v1(2740,2955) C24.2 ; v1(2740,3250) C31.2 ; v1(2745,2875) C30.2 ; C11.2 v1(2970,3525) C10.2 ; C22.2 v1(2980,3405) ; v1(3130,2685) C28.2@3130,2725 ; C33.2 v1(3180,2570) ; v1(3245,3525) C12.2 ; C27.2 v1(3450,2935) ; C20.2 v1(3450,3375) ; v1(3580,3040) C23.2
HSWAPEN: R12.2 U1.144 | length 362.8
  Top Layer w12: R12.2 2475,3440 2515,3480 2730.87,3480 U1.144
INIT_B: R11.1 U1.39 | length 414.3
  Top Layer w10: R11.1 2789.88,2222.28 U1.39
IOP0: "I/O Ports.18" U1.81 | length 1948.5
  Top Layer w10: U1.81 3735.06,2857.99 4211.53,2381.53 4211.53,1496.53 4205,1490 4120,1490 4070,1540
IOP1: "I/O Ports.17" U1.82 | length 2113
  Top Layer w10: U1.82 3739.42,2877.68 4228.53,2388.57 4228.53,1489.49 4212.04,1473 4037,1473 3970,1540
IOP2: "I/O Ports.16" U1.83 | length 2277.4
  Top Layer w10: U1.83 3512.13,2895.58 3745.56,2895.58 4245.53,2395.61 4245.53,1482.44 4219.08,1456 3974,1456 3890,1540 3870,1540
IOP3: "I/O Ports.15" U1.97 | length 2616
  Top Layer w10: U1.97 3602.05,3172.95 3752.6,3022.4 3752.6,2912.58 4265,2400.18 4265,1475 4229,1439 3871,1439 3770,1540
IOP4: "I/O Ports.14" U1.98 | length 2780.5
  Top Layer w10: U1.98 3512.13,3190.86 3608.18,3190.86 3769.6,3029.44 3769.6,2919.62 4282,2407.22 4282,1467.96 4236.04,1422 3788,1422 3670,1540
IOP5: "I/O Ports.13" U1.99 | length 2945
  Top Layer w10: U1.99 3610.76,3212.32 3786.6,3036.49 3786.6,2933.4 4299,2421 4299,1460.92 4243.08,1405 3705,1405 3570,1540
IOP6: "I/O Ports.12" U1.100 | length 3109.5
  Top Layer w10: 3470,1540 3622,1388 4250.12,1388 4316,1453.88 4316,2428.04 3803.6,2940.44 3803.6,3043.53 3616.9,3230.23 3512.13,3230.23 U1.100
IOP7: "I/O Ports.11" U1.101 | length 3273.9
  Top Layer w10: 3370,1540 3539,1371 4257.17,1371 4333,1446.83 4333,2435.08 3820.6,2947.49 3820.6,3050.57 3621.17,3250 3620,3250 3618.31,3251.69 U1.101
IOP8: "I/O Ports.10" U1.102 | length 3438.4
  Top Layer w10: 3270,1540 3456,1354 4264.21,1354 4350,1439.79 4350,2442.12 3837.6,2954.53 3837.6,3057.61 3623.83,3271.38 U1.102
IOP9: "I/O Ports.9" U1.105 | length 3619.2
  Top Layer w10: 3170,1540 3373,1337 4271.25,1337 4367,1432.75 4367,2449.17 3854.6,2961.57 3854.6,3064.65 3588.82,3330.43 U1.105
IOP10: "I/O Ports.8" U1.121 | length 1982.8
  Top Layer w10: U1.121 3203.27,3371.73 v1(3205,3370)
  Bottom Layer w10: 3070,1540 3070,1765 3212,1907 3212,3363 v1(3205,3370)
IOP11: "I/O Ports.7" U1.137 | length 1954.2
  Top Layer w10: U1.137 2888.31,3425.19 2900,3413.5 v1(2900,3385)
  Bottom Layer w10: v1(2900,3385) 2900,3375 2970,3305 2970,1540
IOP12: "I/O Ports.6" U1.138 | length 2074.8
  Top Layer w10: v1(2855,3530) 2868.62,3516.38 U1.138
  Bottom Layer w10: v1(2855,3530) 2874,3511 2874,1544 2870,1540
IOP13: "I/O Ports.5" U1.139 | length 1953.1
  Top Layer w10: v1(2848.94,3386.06) U1.139
  Bottom Layer w10: 2770,1540 2770,2565 2848.94,2643.94 v1(2848.94,3386.06)
IOP14: "I/O Ports.4" U1.140 | length 2136.7
  Top Layer w10: v1(2805,3528.5) 2829.25,3504.25 U1.140
  Bottom Layer w10: 2670,1540 2682,1552 2682,2332.96 2717,2367.96 2717,2923 2700,2940 2700,3391.06 2749,3440.06 2749,3472.5 v1(2805,3528.5)
IOP15: "I/O Ports.3" U1.141 | length 2214.9
  Top Layer w10: v2(2640,3445) 2675,3410 2799.13,3410 2809.57,3420.43 U1.141
  Bottom Layer w10: 2570,1540 2570,1765 2665,1860 2665,2340 2700,2375 2700,2915.96 2683,2932.96 2683,3407 2645,3445 v2(2640,3445)
IOP16: "I/O Ports.2" U1.142 | length 2314.6
  Top Layer w10: v2(2470,3485) 2492.79,3507.79 2777.61,3507.79 2789.88,3495.52 U1.142
  Bottom Layer w10: 2470,1540 v2(2470,3485)
M0: R13.2 U1.69 | length 519.5
  Top Layer w10: R13.2@3522.4,2215 R13.2
  Top Layer w12: v1(3380.43,2570.43) U1.69 ; v2(3450,2215) R13.2@3522.4,2215
  Bottom Layer w12: v1(3380.43,2570.43) 3380.43,2364.57 3450,2295 v2(3450,2215)
MOSI: PROM.5 U1.64 | length 796.6
  Top Layer w10: U1.64 3282.01,2586.58 3765,2103.59 PROM.5
NetD1_1: D1.1 R10.2 | length 159.2
  Top Layer w10: D1.1 D1.1@3315,2005 ; R10.2 3335,2127.6 R10.2@3335,2125
  Top Layer w13: D1.1@3315,2005 3315,2105 R10.2@3335,2125
NetD2_1: D2.1 R11.2 | length 186.9
  Top Layer w10: R11.2 2785,2090 D2.1
NetLCD_14: LCD.14 R8.2 | length 189.7
  Top Layer w10: R8.2@1377.6,4270 R8.2
  Top Layer w20: LCD.14 R8.2@1377.6,4270
NetR7_2: PROM.7 R7.2 | length 160.7
  Top Layer w20: R7.2 PROM.7
NetR9_2: PROM.3 R9.2 | length 218.1
  Top Layer w20: R9.2 3785,2410 3815,2380 PROM.3
NetU1_55: U1.55 X1.3 | length 269
  Top Layer w10: U1.55 3104.84,2452.83 X1.3
PROGRAM_B: R5.2 S1.1 U1.37 | length 353.3
  Top Layer w10: S1.1 2637.4,2417.4 R5.2 2750.51,2447.91 U1.37
RESET: R14.2 S4.1 U1.80 | length 775.6
  Top Layer w10: U1.80 3621.69,2838.31 v2(3635,2825) ; S4.1 4172.4,2855 R14.2
  Bottom Layer w10: v2(3635,2825) 4110,2825 S4.1
ROW0: Keypad.5 R1.2 U1.32 | length 1285.7
  Top Layer w10: R1.2 1585,2445 Keypad.5 1919.25,2779.25 U1.32
ROW1: Keypad.6 R2.2 U1.30 | length 1259.4
  Top Layer w10: R2.2 1600,2560 Keypad.6 1858.62,2818.62 U1.30
ROW2: Keypad.7 R3.2 U1.29 | length 1226.1
  Top Layer w10: R3.2 1600,2660 Keypad.7 1651.69,2690 1800,2838.31 U1.29
ROW3: Keypad.8 R4.2 U1.27 | length 1194.8
  Top Layer w10: R4.2 1542.4,2790 Keypad.8 1642,2790 1710,2858 2620.23,2858 2639.9,2877.68 U1.27
RS: LCD.13 U1.26 | length 2225.4
  Top Layer w10: v2(2140,2882) 2620.18,2882 2635.55,2897.36 U1.26
  Bottom Layer w10: LCD.13 2140,3225 v2(2140,2882)
tck: JTAG.3 U1.109 | length 1699.8
  Top Layer w10: U1.109 3439.49,3494.49 3545,3600 v2(3545,4695) ; v2(3825,4695) JTAG.3
  Bottom Layer w10: v2(3545,4695) v2(3825,4695)
tdi: JTAG.5 U1.110 | length 1610.9
  Top Layer w10: U1.110 3419.8,3509.8 3515,3605 3515,4770 3590,4845 3675,4845 JTAG.5
tdo: JTAG.4 U1.106 | length 1603.8
  Top Layer w10: U1.106 3559.16,3350.12 3642,3432.96 3642,4612 JTAG.4
tms: JTAG.6 U1.107 | length 1498.7
  Top Layer w10: U1.107 3554.8,3369.8 3625,3440 JTAG.6
VCC: Cin_U1.1 LCD.2 LCD.15 pad.11 R8.1 Reg_3.3.1 USB.1 VCC.1 VCC.2 VCC.3 VCC.4 VCC.5 VCC.6 | length 1476.5
  Top Layer w10: Reg_3.3.1 Reg_3.3.1@2535.59,4458.31 ; Cin_U1.1@2775,4565 Cin_U1.1@2785,4555
  Top Layer w20: R8.1 v2(1555,4265) ; 2575,4564.41 2575,4565
  Top Layer w21: pad.11 2535.59,4606.18 USB.1
  Top Layer w30: v2(1700,4565) 1700.59,4565.59 pad.11 2535.59,4525 ; Reg_3.3.1@2535.59,4458.31 2535.59,4525 ; 2575,4564.41 2535.59,4525 ; 2575,4565 Cin_U1.1@2775,4565
Volt_1_2: C22.1 C24.1 C27.1 C28.1 Cout_U2.1 pad.9 Reg_1.2.3 U1.19 U1.28 U1.52 U1.89 U1.128 | length 4494.2
  Top Layer w10: v1@2734.84,3035.16 v1(2735,3035) ; v1@3045.79,2680.79 v1(3050,2685) ; v1(3060,3400) v1@3065.47,3405.47 ; v1(3450,3015) v1@3450.47,3015.47
  Top Layer w12: U1.19 v1@2734.84,3035.16
  Top Layer w13: U1.28 2716.93,2857.99 2725.42,2849.5 v2(2919.5,2849.5) ; U1.52 v1@3045.79,2680.79 ; v1@3065.47,3405.47 U1.128 ; v1@3450.47,3015.47 U1.89
  Top Layer w30: Cout_U2.1 4250,3850 4265,3865 Reg_1.2.3 pad.9 v2(4440,4020)
  VCC w10: 2910,2860 2910.98,2860
  VCC w13: v2(2919.5,2849.5) v2@2920,2850
  VCC w30: v1(3450,3015) 3380,3015 v1(3050,2685) 3015,2720 3015,2755 2920,2850 2910,2860 v1(2735,3035) 2735,3075 v1(3060,3400) 3069,3409 4390,3409 4440,3459 v2(4440,4020)
  Bottom Layer w30: v1(2735,3035) C24.1 ; v1(3050,2685) C28.1@3050,2725 ; C22.1 v1(3060,3400) ; C27.1 v1(3450,3015)
pads on no net: "I/O Ports.19" U1.1 U1.14 U1.15 U1.16 U1.17 U1.21 U1.22 U1.23 U1.24 U1.34 U1.40 U1.41 U1.43 U1.44 U1.45 U1.46 U1.47 U1.48 U1.50 U1.51 U1.56 U1.57 U1.58 U1.59 U1.61 U1.62 U1.66 U1.67 U1.72 U1.74 U1.75 U1.84 U1.85 U1.87 U1.88 U1.92 U1.93 U1.94 U1.95 U1.104 U1.111 U1.112 U1.114 U1.115 U1.116 U1.117 U1.118 U1.119 U1.120 U1.123 U1.124 U1.126 U1.127 U1.131 U1.132 U1.133 U1.134 U1.143 USB.2 USB.3 USB.4 USB.M1 USB.M2 USB.S1 USB.S2 USB.S3 USB.S4

## Polygon pours and split planes (outlines as drawn)
"3.3 Volts" on VCC "3.3 Volts" (solid, pour order 3): 1755,1085 4385,1085 4385,4915 1755,4915
VCC on VCC "5 Volts" (solid, pour order 4): 1100,1085 1740,1085 1740,4915 1100,4915
GND on GND (split plane): 4494.9,1070.1 1090.1,1070.1 1090.1,4934.9 4494.9,4934.9

## Keep-outs
Keep-Out Layer:
  the board outline again, w12

## Silkscreen, mask and mechanical layers (free items; w line width, h text height)
Top Overlay:
  text "CLK" at 3235,2350 h40 r90.22
  text "GND" at 3750,2290 h30 r90
  text "CSO" at 3950,2290 h30 r90
  text "GND" at 3235,2185 h40 r90
  text "3.3V" at 3950,2005 h30 r90
  text "MOSI" at 3750,2000 h30 r90
  text "Team 3  TAGU3EEFHHJMWSZ" at 2885,1300 h60
  text "EECE 2021" at 2895,1170 h60